# Altium PCB DebugBoard.PcbDoc
Units mil, origin at the board's own origin, x right, y up, seen from the top; angles counter-clockwise.
Board outline 1300 x 1525 mil, 2 copper layers (Top Layer, Bottom Layer), stack 83.452 mil thick; 12 components, 13 nets, 55 pads, 75 vias.
Unrouted connection lines stored in the file: 18.
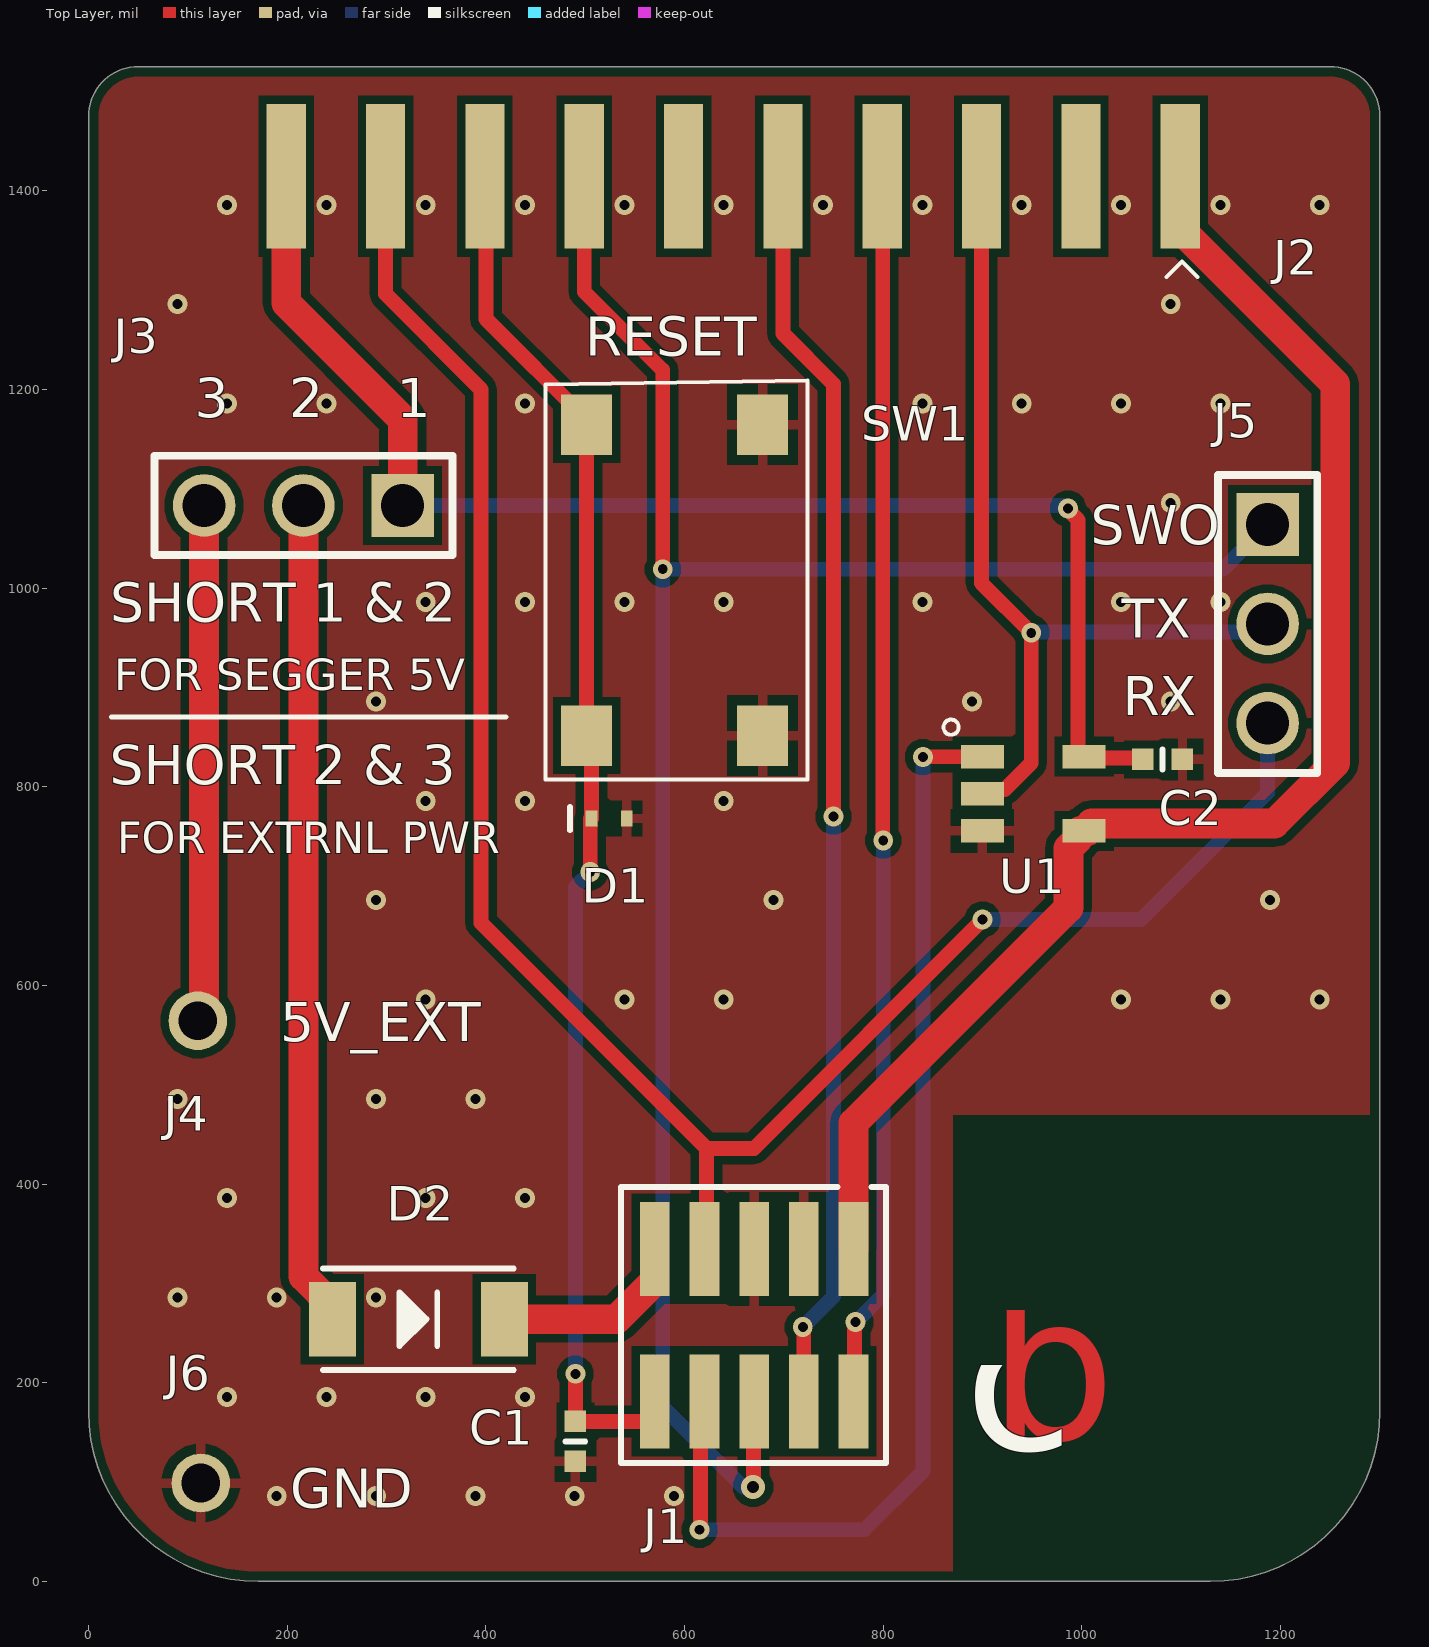
[diagram p0: Top Layer view]
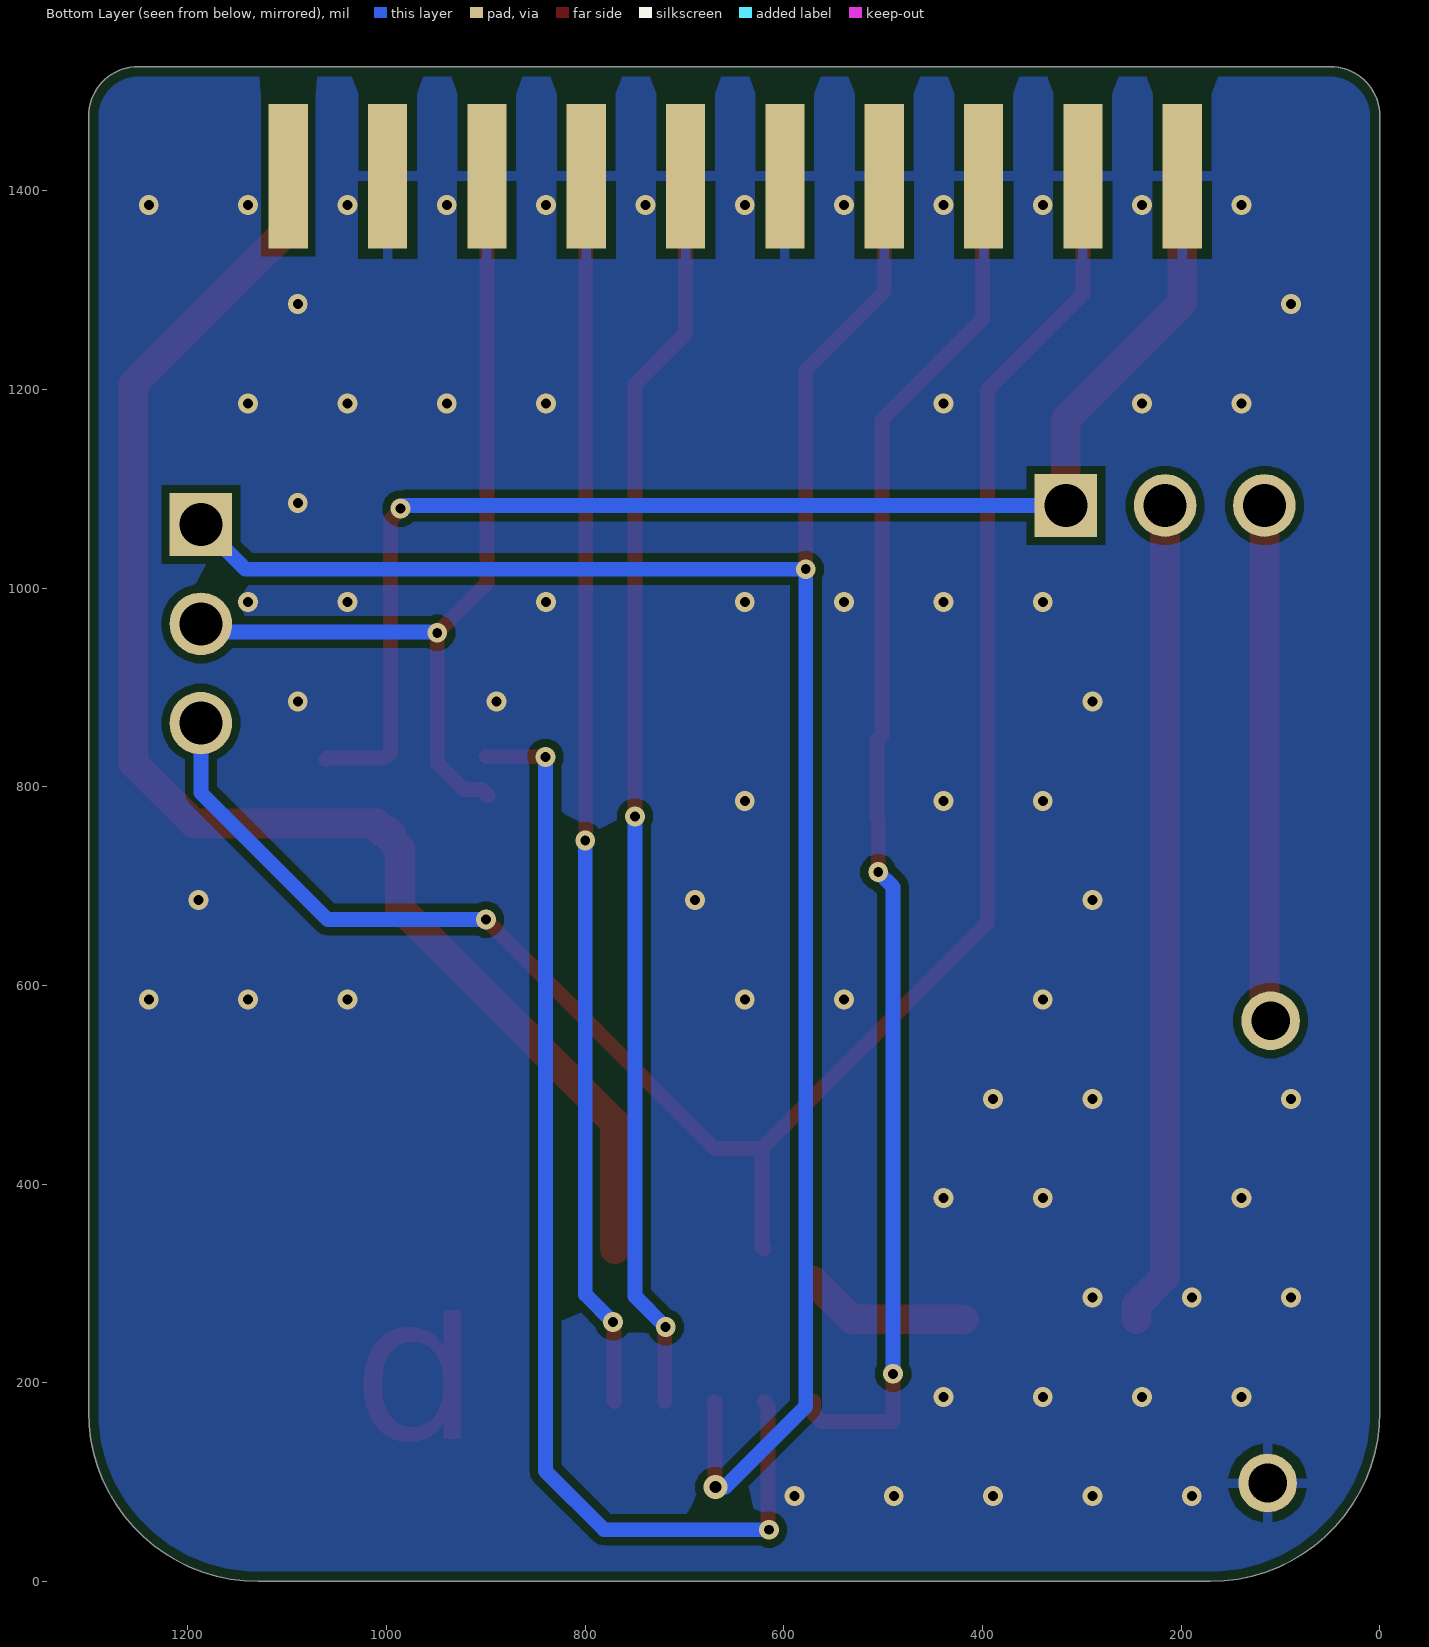
[diagram p1: Bottom Layer view, seen from below]
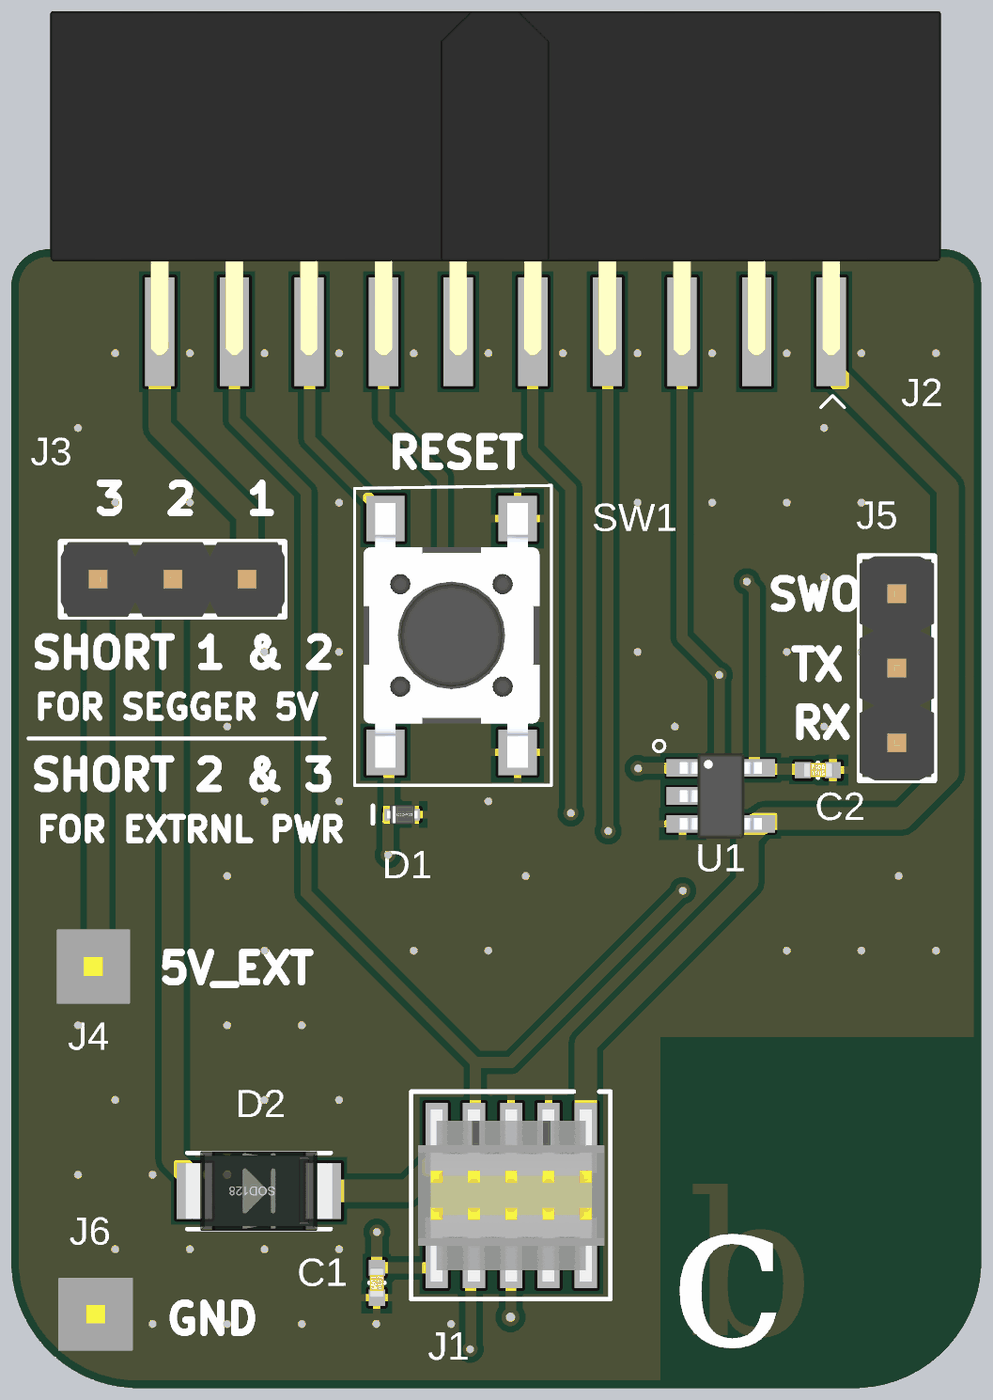
[diagram p2: 3D render of the assembled board from above, using the file's embedded part models]

## Layer stack, top to bottom
Top Solder: solder mask 0.4, Solder Resist, Dk 3.5
Top Layer: signal copper 1.4
Dielectric 1: dielectric 80.652, FR-4, Dk 4.8
Bottom Layer: signal copper 1.4
Bottom Solder: solder mask 0.4, Solder Resist, Dk 3.5

## Board outline
0,170.71 0,1475 cw(c50,1475) 50,1525 1250,1525 cw(c1250,1475) 1300,1475 1300,170.71 cw(c1129.29,170.71) 1129.29,0 170.71,0 cw(c170.71,170.71)

## Design rules (kind name [scope] priority, off if disabled: settings)
BoardOutlineClearance [All] p1: gap=10 ignorepadtopadclearanceinfootprint=FALSE
Clearance [All] p1: gap=8.03 ignorepadtopadclearanceinfootprint=FALSE
DiffPairsRouting [All] p1: maxlimit=10 minlimit=2.5 mostfreqgap=5 toplayer_minwidth=7 toplayer_maxwidth=18 toplayer_prefwidth=18 bottomlayer_minwidth=7 bottomlayer_maxwidth=18 bottomlayer_prefwidth=18 impedanceprofiledriven=TRUE maxuncoupledlength=500
HoleSize [All] p1: absolutevalues=TRUE maxlimit=196.85 minlimit=6.02 maxpercent=80.000 minpercent=20.000
MinimumSolderMaskSliver [All] p1: minsoldermaskwidth=1
PolygonConnect [All] p1: thpad.connectstyle=Relief thpad.reliefconductorwidth=10 thpad.reliefentries=4 thpad.polygonreliefangle="90 Angle" thpad.airgapwidth=10 smdpad.connectstyle=Relief smdpad.reliefconductorwidth=10 smdpad.reliefentries=4 smdpad.polygonreliefangle="90 Angle" smdpad.airgapwidth=10 via.connectstyle=Direct via.reliefconductorwidth=10 via.reliefentries=4 via.polygonreliefangle="90 Angle" via.airgapwidth=10
RoutingVias [All] p1: holewidth=12.01 width=24.02 viastyle="Through Hole" minholewidth=10 minwidth=20 maxholewidth=19.68 maxwidth=50
SilkToSolderMaskClearance [IsPad] p1: minsilkscreentomaskgap=1 clearancetoexposedcopper=TRUE
SolderMaskExpansion [All] p1: expansion=4 istentingtop=FALSE
Width [All] p1: maxlimit=1000 minlimit=8.03 preferedwidth=10 minimp=50.000000 maximp=50.000000 favimp=50.000000
26 further rules are at their usual default settings.

## Components (designator, comment, footprint, x,y, rotation, side; value= is the part's Value field where it differs from the comment)
C1 "GCM155R71H104KE02D" CAP-0402 490,141 r90 top value=0.1µF
C2 "GCM155R71H104KE02D" CAP-0402 1081.24,827.53 r180 top value=0.1µF
D1 "CPDQ3V3U-HF" DIODE-SOD923f 524,768 r180 top
D2 "PMEG3010EP,115" DIODE-SOD128 332,264 r0 top
J1 "FTSH-105-01-L-DV-K" HDR-V-2X5-M 670,258 r270 top
J2 "SFH11-PBPC-D10-ST-BK" HDR-V-2X10-F-2.54MM 649,1454 r0 top
J3 "61300311121" HDR-V-1X3 216.26,1083.17 r180 top
J4 "75160-101-01LF" HDR-V-1X1-M 110,564.47 r270 top
J5 "61300311121" HDR-V-1X3 1187,964 r270 top
J6 "75160-101-01LF" HDR-V-1X1-M 113,99 r0 top
SW1 "PTS645SK50SMTR92 LFS" BTN-SPST-PTS645SK50SMTR92 590,1008 r90 top
U1 "MAX4516EUK+T" IC-SOT-23-5 951,793 r0 top

## Footprints (in the part's own frame and the unit in brackets; to place one, negate y for a bottom-side part, rotate by r counter-clockwise, add the part's x,y. Pads: shape width x height; smd on the part's side, far side on the other; paste and mask are expansions set on the pad)
BTN-SPST-PTS645SK50SMTR92 [mm]
  rect 1.55x1.3 smd: 1(-3.975,2.25) 2(3.975,2.25) 3(-3.975,-2.25) 4(3.975,-2.25)
  silkscreen extent -5.1,-3.4 5.1,3.3, body extent -4.5,-3 4.5,3, height 5.1
CAP-0402 [mm]
  rect 0.55x0.55 smd: 1(-0.508,0) 2(0.508,0)
  silkscreen extent 0,-0.25 0,0.25, body extent -0.5,-0.25 0.5,0.25, height 0.5
DIODE-SOD128 [mm]
  rect 1.2x1.9 smd: 1(2.2,0) 2(-2.2,0)
  silkscreen extent -2.44,-1.3 2.44,1.3, body extent -2.5,-1.35 2.5,1.35, height 1.1
DIODE-SOD923f [mm]
  rect 0.3x0.4 smd: 1(0.45,0) 2(-0.45,0)
  silkscreen extent 1,-0.3 1,0.3, body extent -0.53,-0.32 0.52,0.32, height 0.43
HDR-V-1X1-M [mm]
  round 1.5 hole 0.99: 1(0,0)
  body extent -1.27,-1.24 1.27,1.24, height 12.7
HDR-V-1X3 [mm]
  rect 1.6x1.6 hole 1.1: 1(-2.54,0)
  round 1.6 hole 1.1: 2(0,0) 3(2.54,0)
  silkscreen extent -3.81,-1.27 3.81,1.27, body extent -3.81,-1.27 3.81,1.27, height 8.55
HDR-V-2X5-M [mm] "JTAG"
  rect 2.4x0.76 smd: 1(-1.95,2.54) 2(1.95,2.54) 3(-1.95,1.27) 4(1.95,1.27) 5(-1.95,0) 6(1.95,0) 7(-1.95,-1.27) 8(1.95,-1.27) 9(-1.95,-2.54) 10(1.95,-2.54)
  silkscreen extent -3.53,-3.4 3.53,3.38, body extent -2.92,-3.17 2.92,3.17, height 6.16
HDR-V-2X10-F-2.54MM [mm]
  rect 1x3.7 smd: 1(11.43,-1) 3(8.89,-1) 5(6.35,-1) 7(3.81,-1) 9(1.27,-1) 11(-1.27,-1) 13(-3.81,-1) 15(-6.35,-1) 17(-8.89,-1) 19(-11.43,-1)
  rect 1x3.7 smd far side: 2(11.43,-1) 4(8.89,-1) 6(6.35,-1) 8(3.81,-1) 10(1.27,-1) 12(-1.27,-1) 14(-3.81,-1) 16(-6.35,-1) 18(-8.89,-1) 20(-11.43,-1)
  silkscreen extent 11.08,-3.58 11.88,-3.18, body extent -15.16,-1.8 15.16,9.9, height 3.04
IC-SOT-23-5 [mm]
  rect 1.1x0.6 smd mask+0.07: 1(-1.3,0.95) 2(-1.3,0) 3(-1.3,-0.95) 4(1.3,-0.95) 5(1.3,0.95)
  silkscreen extent -2.29,1.51 -1.91,1.89, body extent -1.4,-1.45 1.4,1.45, height 1.45

## Part data
C1 C2: library part CAP-0.1uF-50V-0402, "CAP CER 0.1UF 50V X7R 0402 10%", Capacitance=100nF, Case Code (Imperial)=0402, Case Code (Metric)=1005, Dielectric=X7R, Manufacturer 1=Murata, Max Operating Temperature=125°C, Min Operating Temperature=-55°C, Package Quantity=10000, Ratings=AEC-Q200, Supplier Part Number 1=490-10672-1-ND, Tolerance=10%, Voltage Rating=50V, Case/Package=0402, ComponentLink1Description=http://www.mouser.com/ds/2/281/c03e-806517.pdf?src-supplier=Mouser, ComponentLink1URL=http://www.mouser.com/ds/2/281/c03e-806517.pdf?src-supplier=Mouser, ComponentLink2Description=http://www.farnell.com/datasheets/2079122.pdf?src-supplier=Farnell, ComponentLink2URL=http://www.farnell.com/datasheets/2079122.pdf?src-supplier=Farnell, ComponentLink3Description=http://www.farnell.com/datasheets/2079122.pdf?src-supplier=Newark, ComponentLink3URL=http://www.farnell.com/datasheets/2079122.pdf?src-supplier=Newark, ComponentLink4Description=http://www.farnell.com/datasheets/2079122.pdf?src-supplier=Element14, ComponentLink4URL=http://www.farnell.com/datasheets/2079122.pdf?src-supplier=Element14, ComponentLink5Description=http://search.murata.co.jp/Ceramy/image/img/A01X/partnumbering_e_02.pdf?src-supplier=Digi-Key, ComponentLink5URL=http://search.murata.co.jp/Ceramy/image/img/A01X/partnumbering_e_02.pdf?src-supplier=Digi-Key, Height=0.5mm, Lead Free="Lead Free", Length=0.039inch, Manufacturer Part Number 1=GCM155R71H104KE02D, Mount="Surface Mount", Packaging="Tape and Reel", Pricing 1="1=0.10000, 10=0.06100, 100=0.02730, 500=0.01952, 1000=0.01533, 2500=0.01394, 5000=0.01282 (USD)", REACH SVHC="No SVHC", RoHS=Yes, Stock 1=254896, Supplier 1=Digi-Key, Termination=SMD/SMT, Thickness=0.022inch, Voltage Rating (DC)=50V, Weight=0.000212oz, Width=0.5mm
D1: library part DIODE-TVS-3.3V-SOD923F, "TVS DIODE 3.3V 10.4V SOD923F", Breakdown Voltage=5V, Clamping Voltage=14.1V, Manufacturer 1=Comchip, Max Operating Temperature=150°C, Min Operating Temperature=-55°C, Package Quantity=8000, Peak Pulse Current=9.8A, Peak Pulse Power=102W, Power Line Protection=No, Resistor Type=Zener, Reverse Standoff Voltage=3.3V, Supplier Part Number 1=641-1477-1-ND, Category="TVS Diodes", ComponentLink1Description=https://datasheet.ciiva.com/6578/cpdq3v3u-hf-6578247.pdf?src-supplier=Digi-Key, ComponentLink1URL=https://datasheet.ciiva.com/6578/cpdq3v3u-hf-6578247.pdf?src-supplier=Digi-Key, ComponentLink2Description=https://datasheet.ciiva.com/12545/cpdq3v3u-hf-216634-12545533.pdf?src-supplier=Mouser, ComponentLink2URL=https://datasheet.ciiva.com/12545/cpdq3v3u-hf-216634-12545533.pdf?src-supplier=Mouser, Diode Type=ZENER, Manufacturer Part Number 1=CPDQ3V3U-HF, Min Breakdown Voltage=5V, Mount="Surface Mount", Number of Channels=1, Number of Unidirectional Channels=1, Packaging="Tape and Reel", Pricing 1="1=0.35000, 10=0.29000, 100=0.15360, 500=0.10106, 1000=0.06872, 2000=0.06199 (USD)", RoHS=Yes, RoHS Compliant=Yes, Series=-, Stock 1=9425, Supplier 1=Digi-Key, Termination=SMD/SMT
D2: library part DIODE-SCHOTTKY-30V-1A-SOD128, "DIODE SCHOTTKY 30V 1A SOD128", Base Part Number=PMEG3010, Capacitance @ Vr, F="170pF @ 1V, 1MHz", Current - Average Rectified (Io)=1A, Manufacturer 1="Nexperia USA Inc.", Operating Temperature - Junction="150°C (Max)", Package / Case=SOD-128, Reverse Voltage=30V, Supplier Device Package=CFP5, Supplier Part Number 1=1727-5408-1-ND, Category="Discrete Semiconductor Products", ComponentLink1Description=https://assets.nexperia.com/documents/data-sheet/PMEG3010EP.pdf, ComponentLink1URL=https://assets.nexperia.com/documents/data-sheet/PMEG3010EP.pdf, Diode Type=Schottky, Manufacturer Part Number 1=PMEG3010EP,115, Mounting Type="Surface Mount", Packaging="Tape & Reel (TR)", Part Status=Active, Pricing 1="3000=0.11556, 6000=0.10856, 15000=0.10155, 30000=0.09338 (USD)", RoHS="RoHS Compliant", Speed="Fast Recovery =< 500ns, > 200mA (Io)", Stock 1=0, Supplier 1=Digi-Key
J1: library part HDR-V-2X5-M-JTAG, "CONN HEADER 10 POS DUAL .05\" SMD", Colour=Black, Manufacturer=Samtec, Max Current Rating=1.75A, Max Operating Temperature=125°C, Min Operating Temperature=-55°C, Package Quantity=1, Supplier Part Number 1=SAM8799-ND, ComponentLink1Description=https://datasheet.ciiva.com/728/ftsh-1xx-xx-xxx-dv-xxx-mkt-728872.pdf, ComponentLink1URL=https://datasheet.ciiva.com/728/ftsh-1xx-xx-xxx-dv-xxx-mkt-728872.pdf, ComponentLink2Description=https://datasheet.ciiva.com/10245/ftsh-mt-10245272.pdf, ComponentLink2URL=https://datasheet.ciiva.com/10245/ftsh-mt-10245272.pdf, ComponentLink3Description=https://datasheet.ciiva.com/16657/ftsh-mt-16657372.pdf, ComponentLink3URL=https://datasheet.ciiva.com/16657/ftsh-mt-16657372.pdf, ComponentLink4Description=https://datasheet.ciiva.com/22703/ftsh-smt-22703900.pdf, ComponentLink4URL=https://datasheet.ciiva.com/22703/ftsh-smt-22703900.pdf, ComponentLink5Description=https://datasheet.ciiva.com/26936/getdatasheetpartid-175877-26936879.pdf, ComponentLink5URL=https://datasheet.ciiva.com/26936/getdatasheetpartid-175877-26936879.pdf, Connector Type="Male Pin", Contact Material=Bronze, Contact Mating Length=0.12inch, Contact Plating=Nickel,Gold, Depth=3.43mm, Gender=Male, Housing Colour=Black, Housing Material=Polymer, Lead Free="Lead Free", Length=6.35mm, Manufacturer 1=Samtec, Manufacturer Part Number 1=FTSH-105-01-L-DV-K, Mount="Surface Mount", MPN=FTSH-105-01-L-DV-K, Number of Contacts=10, Number of Positions=10, Number of Rows=2, Orientation=Straight, Packaging=Rail/Tube, Pitch=1.27mm, Pricing 1="1=3.13, 10=3, 100=2.5, 500=2.125, 1000=1.8125, 5000=1.625 (USD)", Radiation Hardening=No, REACH SVHC="No SVHC", Row Spacing=0.05inch, Stock 1=7189, Supplier 1=Digi-Key, Termination=Solder
J2: library part HDR-V-2X10-F-2.54MM, "20 Position Header Connector 0.100\" (2.54mm) Through Hole Gold", Color=Black, Manufacturer 1=Sullins, Package Quantity=1, Supplier Part Number 1=S9197-ND, Category="Headers and Wire Housings", ComponentLink1Description=https://datasheet.ciiva.com/754/sfh11-pxxc-dxx-st-xx11160-c-754558.pdf?src-supplier=Digi-Key, ComponentLink1URL=https://datasheet.ciiva.com/754/sfh11-pxxc-dxx-st-xx11160-c-754558.pdf?src-supplier=Digi-Key, Connector Type=Header, Contact Plating=Gold, Contact Type="Female Socket", Lead Free="Lead Free", Manufacturer Part Number 1=SFH11-PBPC-D10-ST-BK, Mount="Through Hole", Number of Positions=20, Number of Rows=2, Packaging=Tray, Pitch=0.1inch, Pricing 1="1=1.15000, 10=0.96800, 80=0.86925, 440=0.71118, 1000=0.63216, 5000=0.57070 (USD)", RoHS=Yes, RoHS Compliant=Yes, Row Spacing=0.1inch, Series=SFH11, Stock 1=51703, Supplier 1=Digi-Key, Termination=Solder
J3 J5: library part HDR-V-1X3-M, "Header, 3-Pin, 0.1\"", Colour=Black, Manufacturer="Wurth Electronics", Supplier Part Number 1=732-5316-ND, ComponentLink1Description=http://www.farnell.com/cad/1737268.pdf, ComponentLink1URL=http://www.farnell.com/cad/1737268.pdf, ComponentLink2Description=http://katalog.we-online.de/em/datasheet/6130xx11121.pdf, ComponentLink2URL=http://katalog.we-online.de/em/datasheet/6130xx11121.pdf, Connector Type="Male Pin", Contact Material=Copper, Contact Mating Length=0.236inch, Contact Plating=Gold, Gender=Male, LatestRevisionDate=17-Jul-2002, LatestRevisionNote="Re-released for DXP Platform.", Lead Free="Lead Free", Manufacturer 1="Wurth Electronics", Manufacturer Part Number 1=61300311121, Mount="Through Hole", MPN=61300311121, Number of Contacts=3, Number of Positions=3, Number of Rows=1, Packaging=Bulk, Pitch=0.1inch, Pricing 1="1=0.13, 10=0.106, 25=0.088, 50=0.074, 100=0.067, 1000=0.061 (USD)", Publisher="Altium Limited", REACH SVHC=Unknown, Stock 1=41782, Supplier 1=Digi-Key, Termination=Solder
J4 J6: library part HDR-V-1X1-M, "BergStik®, Board to Board connector, Unshrouded vertical header, through hole, single Row, 1 position, 2.54mm pitch", Color=Black, Current Rating=3A, Insulation Resistance=5GR, Manufacturer 1="Amphenol ICC / FCI", Package Quantity=1000, Supplier Part Number 1=649-75160-101-01LF, Voltage Rating=1.5kV, Category=Connectors, ComponentLink1Description=https://datasheet.ciiva.com/29149/75160-29149349.pdf?src-supplier=Digi-Key, ComponentLink1URL=https://datasheet.ciiva.com/29149/75160-29149349.pdf?src-supplier=Digi-Key, Connector Type="Male Pin", Contact Gender=Male, Contact Material=Bronze, Contact Mating Length=0.225inch, Contact Plating=Gold,GXT, Contact Post Length=2.54mm, Contact Type="Male Pin", Depth=2.8mm, Gender=Male, Housing Color=Black, Housing Material=Thermoplastic, Length=2.54mm, Manufacturer Part Number 1=75160-101-01LF, Mounting Technology="Through Hole", Number of Contacts=1, Number of Positions=1, Number of Rows=1, Orientation=Straight, Packaging=Bulk, Pitch=2.54mm, Pricing 1="1=0.36000, 10=0.27000, 50=0.27000, 100=0.21400, 1000=0.16800, 10000=0.12900 (USD)", Radiation Hardening=No, RoHS=Yes, Series="BERGSTIK®, MezzSelect™, Basics+", Stock 1=4529, Supplier 1=Mouser, Termination=Solder
SW1: library part BTN-SPST-PTS645SK50SMTR92, "C & K COMPONENTS - PTS645SK50SMTR92LFS - SWITCH, SPST, 0.05A, 12VDC, SMD, 5MM", Case/Package=SMD/SMT, Color=Red, Contact Resistance=100mR, Current Rating=50mA, Manufacturer 1="ITT C&K", Manufacturer Part Number 1=PTS645SK50SMTR92LFS, Max Operating Temperature=60°C, Max Voltage Rating (DC)=12V, Min Operating Temperature=-20°C, Operating Force=260gf, Package Quantity=1, Supplier Part Number 1=CKN9087CT-ND, Actuator Length=1.55mm, Actuator Material=Nylon,Polyamide,PA66, Actuator Type=Standard, Category="Tactile Switches", ComponentLink1Description=https://datasheet.ciiva.com/29903/getdatasheetpartid-741134-29903854.pdf?src-supplier=Verical, ComponentLink1URL=https://datasheet.ciiva.com/29903/getdatasheetpartid-741134-29903854.pdf?src-supplier=Verical, ComponentLink2Description=https://datasheet.ciiva.com/14920/pts645-14920581.pdf?src-supplier=Digi-Key, ComponentLink2URL=https://datasheet.ciiva.com/14920/pts645-14920581.pdf?src-supplier=Digi-Key, ComponentLink3Description=https://datasheet.ciiva.com/22637/1707731-22637358.pdf?src-supplier=Element14, ComponentLink3URL=https://datasheet.ciiva.com/22637/1707731-22637358.pdf?src-supplier=Element14, Contact Material=Bronze, Contact Plating=Silver, Depth=9mm, Illumination Type=Non-Illuminated,Illuminated, Lead Free="Lead Free", Length=6mm, Max Current Rating=50mA, Mechanical Life=100000Cycles, Mount="Surface Mount", Orientation=Straight, Packaging="Tape and Reel", Pricing 1="1=0.15000, 10=0.14900, 25=0.14120, 100=0.12840, 250=0.12068, 500=0.11042 (USD)", REACH SVHC="No SVHC", RoHS=Yes, RoHS Compliant=Yes, Series=PTS645, Stock 1=52601, Supplier 1=Digi-Key, Switch Function=Off-Mom, Termination="Gull Wing", Throw Configuration=SPST, Voltage Rating (DC)=12V
U1: library part IC-SW-MAX4516, "MAX4516 Series SPST-NO 6V 20 Ohm SMT Analog Switch - SOT-23", Case/Package=SOT-23-5, Dual Supply Voltage=5V, Manufacturer 1=Maxim, Max Dual Supply Voltage=6V, Max Operating Temperature=85°C, Max Power Dissipation=571mW, Max Supply Current=125uA, Min Dual Supply Voltage=1V, Min Operating Temperature=-40°C, On-State Resistance=20R, Operating Supply Current=40uA, Package Quantity=1, Supplier Part Number 1=73Y4225, Category="Decoders and Multiplexers", ComponentLink1Description=https://datasheet.ciiva.com/1673/max4516-max4517-1673360.pdf?src-supplier=Digi-Key, ComponentLink1URL=https://datasheet.ciiva.com/1673/max4516-max4517-1673360.pdf?src-supplier=Digi-Key, ComponentLink2Description=https://datasheet.ciiva.com/1673/max4516-max4517-1673359.pdf?src-supplier=Digi-Key, ComponentLink2URL=https://datasheet.ciiva.com/1673/max4516-max4517-1673359.pdf?src-supplier=Digi-Key, ComponentLink3Description=https://datasheet.ciiva.com/1673/max4516-max4517-1673343.pdf?src-supplier=Digi-Key, ComponentLink3URL=https://datasheet.ciiva.com/1673/max4516-max4517-1673343.pdf?src-supplier=Digi-Key, ComponentLink4Description=https://datasheet.ciiva.com/2979/max4516-max4517-2979725.pdf?src-supplier=Avnet, ComponentLink4URL=https://datasheet.ciiva.com/2979/max4516-max4517-2979725.pdf?src-supplier=Avnet, Manufacturer Part Number 1=MAX4516EUK+T, Mounting Technology="Surface Mount", Number of Channels=1, Operating Supply Voltage=5V, Packaging="Tape and Reel", Pins=5, Pricing 1="1=2.88000, 10=2.60000, 25=2.45000, 50=2.27000, 100=2.09000, 250=1.96000, 500=1.71000, 1000=1.47000 (USD)", Radiation Hardening=No, RoHS=Yes, RoHS Compliant=Yes, Series=-, Stock 1=1593, Supplier 1=Newark, Supply Type=Dual, Throw Configuration=SPST, Turn-Off Delay Time=75ns, Turn-On Delay Time=100ns, Weight=0.001058oz

## Via types
v1: diameter 20, hole 10, Top Layer to Bottom Layer, tented both sides, 74 vias
v2: diameter 24.02, hole 12.01, Top Layer to Bottom Layer, tented both sides, 1 vias

## Nets (pads, with @x,y where several pads share a name; then routed paths per layer and width w, separated by ;. In a path a pad name is that pad's centre, name@x,y a point inside that pad or via, vN(x,y) a via of type N, cw(c..) or ccw(c..) an arc to the next point about the centre after c; other vN are vias at no path point)
CONN_UART_TX: J1.8 U1.1 | length 1158.4
  Top Layer w15: v1(615,52) 615.96,52.96 615.96,177.18 J1.8 ; v1(840,830) 840.2,830.2 899.62,830.2 U1.1
  Bottom Layer w15: v1(615,52) 781,52 840,111 v1@840,828.71
GND: C1.1 C2.1 D1.2 J1.3 J1.5 J2.4 J2.6 J2.8 J2.10 J2.12 J2.14 J2.16 J2.18 J2.20 J6.1 SW1.3 SW1.4 U1.3
  other v1: 189.37,85.83 289.37,85.83 389.37,85.83 489.37,85.83 589.37,85.83 139.37,185.83 239.37,185.83 339.37,185.83 439.37,185.83 89.37,285.83 189.37,285.83 289.37,285.83 139.37,385.83 339.37,385.83 439.37,385.83 89.37,485.83 289.37,485.83 389.37,485.83 339.37,585.83 539.37,585.83 639.37,585.83 1039.37,585.83 1139.37,585.83 1239.37,585.83 289.37,685.83 689.37,685.83 1189.37,685.83 339.37,785.83 439.37,785.83 639.37,785.83 289.37,885.83 889.37,885.83 1089.37,885.83 339.37,985.83 439.37,985.83 539.37,985.83 639.37,985.83 839.37,985.83 1039.37,985.83 1139.37,985.83 1089.37,1085.83 139.37,1185.83 239.37,1185.83 439.37,1185.83 839.37,1185.83 939.37,1185.83 1039.37,1185.83 1139.37,1185.83 89.37,1285.83 1089.37,1285.83 139.37,1385.83 239.37,1385.83 339.37,1385.83 439.37,1385.83 539.37,1385.83 639.37,1385.83 739.37,1385.83 839.37,1385.83 939.37,1385.83 1039.37,1385.83 1139.37,1385.83 1239.37,1385.83
NetD2_1: D2.1 J1.9 | length 167.3
  Top Layer w30: D2.1 531.43,264 J1.9@569.96,302.53
NRST: C1.2 D1.1 J1.10 J2.15 SW1.1 SW1.2 | length 1401.2
  Top Layer w15: J2.15 400,1413.63 400,1270.83 501.42,1169.42 SW1.2 SW1.1 506.29,846.63 D1.1 505.37,768.01 505,767.63 v1(505,714) ; v1(490,209) C1.2 562.54,161 570,168.46 J1.10
  Bottom Layer w15: v1(490,209) 490,699 v1(505,714)
SWCLK/TCLK: J1.4 J2.9 | length 1267.8
  Top Layer w15: J2.9 699,1256.35 750,1205.35 v1(750,770) ; v1(719,256) 720,255 J1.4
  Bottom Layer w15: v1(719,256) 750,287 v1(750,770)
SWDIO/TMS: J1.2 J2.7 | length 1246.2
  Top Layer w15: J1.2 771.04,182.27 771.04,260.04 v1(772,261) ; J2.7 799.5,1414.13 799.5,746.5 v1(800,746)
  Bottom Layer w15: v1(772,261) 800,289 v1(800,746)
SWO: J1.6 J2.13 J5.1 | length 2110.2
  Top Layer w15: J2.13 499,1298.35 578,1219.35 v1(578,1019) ; v2(669,95) 669.5,95.5 669.5,180.73 J1.6
  Bottom Layer w15: v2(669,95) 659,95 578,176 v1(578,1019) 1142,1019 J5.1
UART_RX: J1.7 J2.17 J5.3 | length 1997.9
  Top Layer w15: J2.17 299,1296 395,1200 395,663 622,436 ; J1.7 622,336.77 622,436 ; v1(900,666.19) 900,666 670,436 622,436
  Bottom Layer w15: v1(900,666.19) 1059.19,666.19 1187,794 J5.3
UART_TX: J2.5 J5.2 U1.2 | length 917.9
  Top Layer w15: U1.2@897.82,791 U1.2 904.13,797.31 922.31,797.31 949,824 v1(949,955) 899,1005 J2.5
  Bottom Layer w15: v1(949,955) 949.96,955.96 1178.96,955.96 J5.2
VDD_DUT: J1.1 J2.1 U1.4 | length 1458.9
  Top Layer w30: J1.1 770,461.4 986.43,677.83 986.43,738.02 995.53,747.12 995.53,752.41 998.72,755.6 U1.4@1005.65,755.6 ; U1.4 1009.58,763 1194,763 1255,824 1255,1205.48 1099,1361.48 J2.1
VSRC: D2.2 J3.2 | length 831.2
  Top Layer w30: J3.2 216.26,306.91 245.39,277.78 D2.2
VSRC_EXT: J3.3 J4.1 | length 521.3
  Top Layer w15: J4.1 J4.1@116.26,570.73
  Top Layer w30: J4.1@116.26,570.73 J3.3
VSRC_SEGGER: C2.2 J2.19 J3.1 U1.5 | length 1368.7
  Top Layer w15: v1(986,1080) 986,1078.71 996,1068.71 996,834.71 1000.31,830.4 U1.5 1003.62,828.97 1059.8,828.97 C2.2
  Top Layer w30: J2.19 199,1287 316.26,1169.74 J3.1
  Bottom Layer w15: J3.1 981.48,1083.17 984.65,1080 v1(986,1080)
pads on no net: J2.2 J2.3 J2.11

## Polygon pours and split planes (outlines as drawn)
GND on Top Layer "NONET_L-01_P-001" (solid, remove dead copper, pour order 1): 0,1525 1300,1525 1300,0 0,0
GND on Bottom Layer "NONET_L-01_P-001" (solid, remove dead copper, pour order 0): 0,1525 1300,1525 1300,0 0,0

## Other copper
Top Layer:
  pour cut-out: 1289.8,10.2 1290,10.39 1290,470 870,470 870,10
  text "b" at 906,71 h380

## Silkscreen, mask and mechanical layers (free items; w line width, h text height)
Top Overlay:
  lines w5: 23,870 420,870
  text "RESET" at 500,1234 h39.37
  text "3" at 107,1172 h39.37
  text "2" at 202,1172 h39.37
  text "1" at 310.42,1172 h39.37
  text "SWO" at 1009,1044 h39.37
  text "SHORT 1 & 2" at 22,966 h39.37
  text "TX" at 1040,950 h39.37
  text "FOR SEGGER 5V" at 26,897 h31.5
  text "RX" at 1041,872 h39.37
  text "SHORT 2 & 3" at 21.38,802.51 h39.37
  text "FOR EXTRNL PWR" at 28.65,732.97 h31.5
  text "5V_EXT" at 193,543.56 h39.37
  text "GND" at 203,74 h39.37
  text "c" at 881.63,57.15 h400
Board Outline:
  the board outline again, w3.94